# Allegro board 野火_H750X_H743X_核心板_V1.0_底板原理图和PCB参考设计_Allegro格式.brd
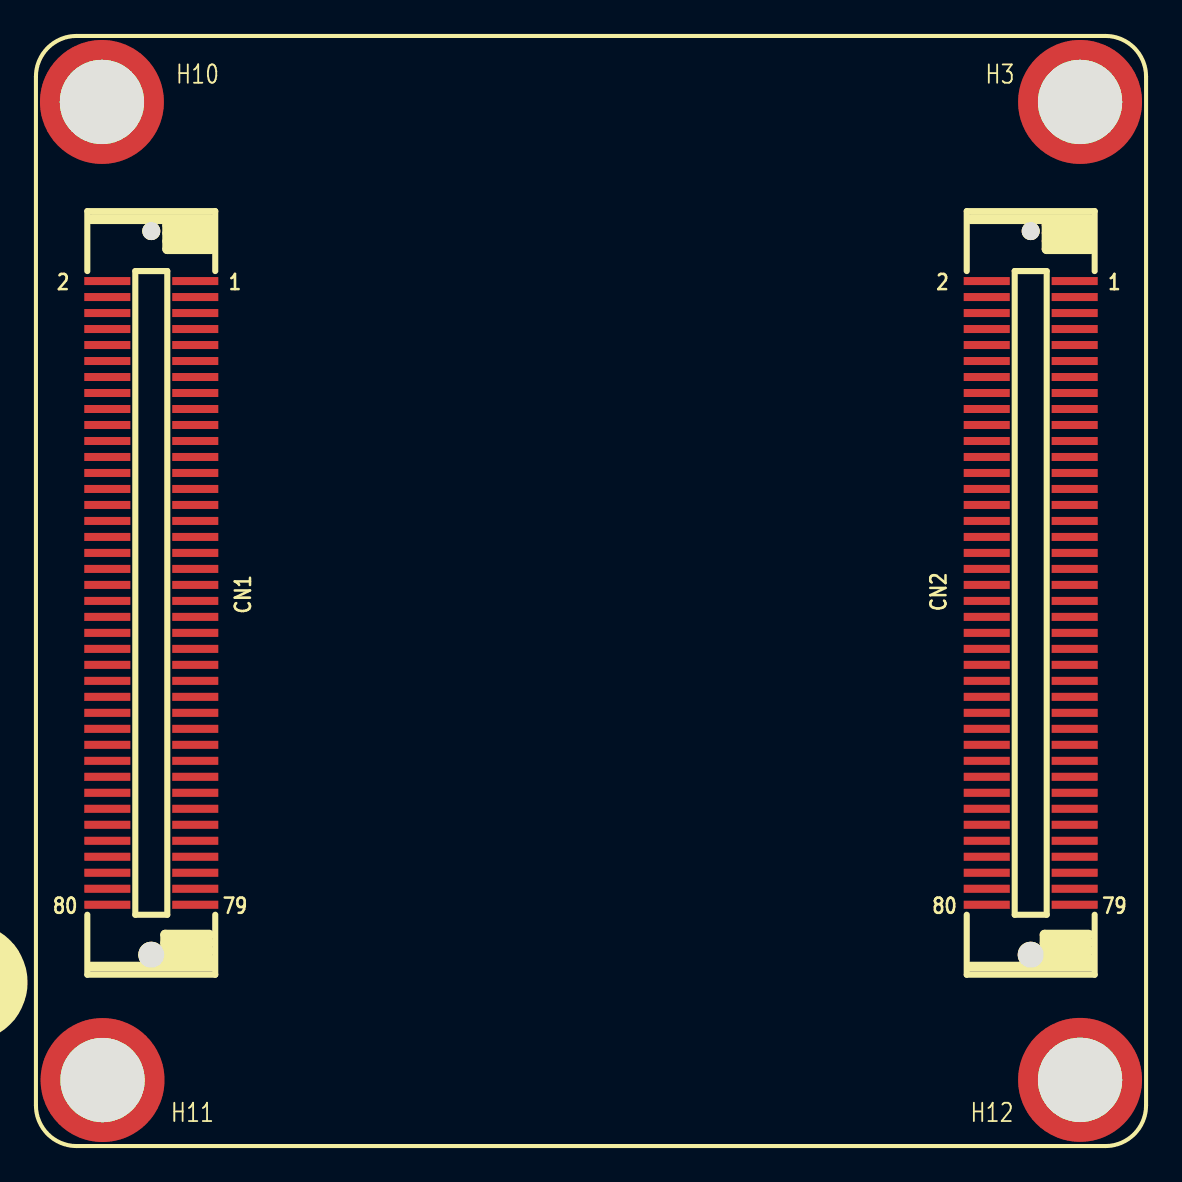
[diagram p0: board, top side]
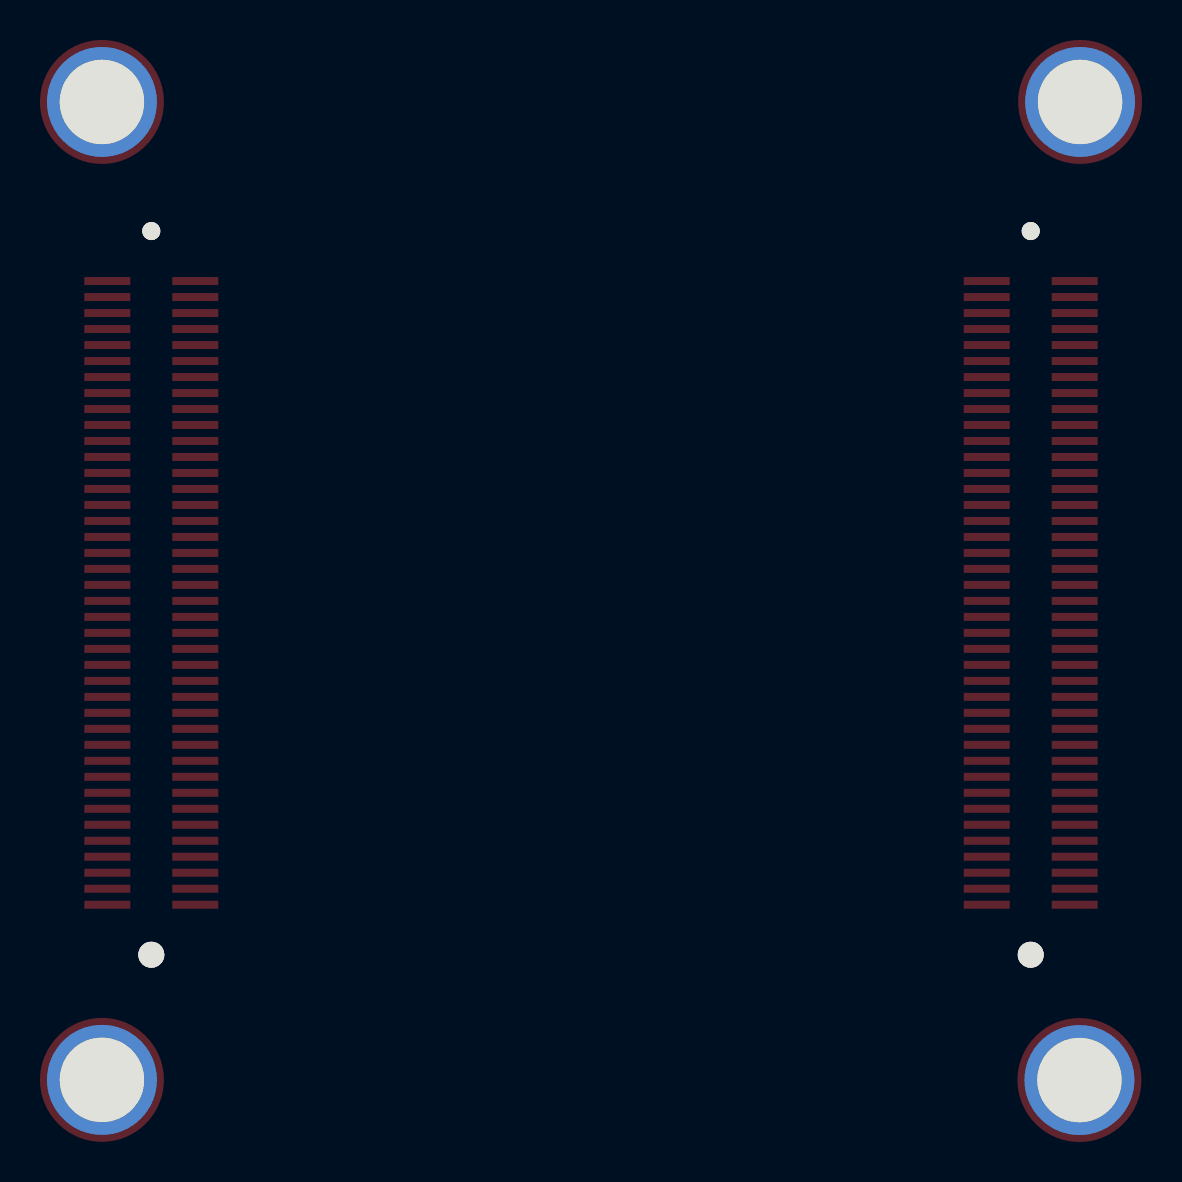
[diagram p1: board, bottom side, seen from below]

No outline. copper layers: TOP, BOTTOM. Coordinates in mm from the lowest, leftmost part position.

## Design rules (mm)
net group DIFFPAIR7: nets PB14 PB15
net group PWR: nets GND VBAT

## Placement (name value [footprint] x y rotation side)
CN1  B2BM_2X40_0P8  [B2BM-2X40-0P8]  9.16 24.37 0 top
CN2  B2BM_2X40_0P8  [B2BM-2X40-0P8]  53.16 24.37 0 top
H3  3.0mm  [T4R2-6R2_TOPSMT]  55.63 48.93 0 top
H10  3.0mm  [T4R2-6R2_TOPSMT]  6.69 48.93 0 top
H11  3.0mm  [T4R2-6R2_TOPSMT]  6.72 0 0 top
H12  3.0mm  [T4R2-6R2_TOPSMT]  55.63 0.01 0 top
NOREF  -  []  0 4.74 0 top

## Library data of the parts
CN1 CN2 = B2BF_2X40_0
H3 H10-H12 = SPACER_0

## Footprints (pads in the part's own frame, mm; a bottom-side part is the same pattern mirrored in y, then rotated)
B2BM-2X40-0P8
  round 0.9 hole 0.9 unplated: (0,18.1)
  round 1.3 hole 1.3 unplated: (0,-18.1)
  rect 2.3x0.4 smd: 1(2.2,15.6) 2(-2.2,15.6) 3(2.2,14.8) 4(-2.2,14.8) 5(2.2,14) 6(-2.2,14) 7(2.2,13.2) 8(-2.2,13.2) 9(2.2,12.4) 10(-2.2,12.4) 11(2.2,11.6) 12(-2.2,11.6) 13(2.2,10.8) 14(-2.2,10.8) 15(2.2,10) 16(-2.2,10) 17(2.2,9.2) 18(-2.2,9.2) 19(2.2,8.4) 20(-2.2,8.4) 21(2.2,7.6) 22(-2.2,7.6) 23(2.2,6.8) 24(-2.2,6.8) 25(2.2,6) 26(-2.2,6) 27(2.2,5.2) 28(-2.2,5.2) 29(2.2,4.4) 30(-2.2,4.4) 31(2.2,3.6) 32(-2.2,3.6) 33(2.2,2.8) 34(-2.2,2.8) 35(2.2,2) 36(-2.2,2) 37(2.2,1.2) 38(-2.2,1.2) 39(2.2,0.4) 40(-2.2,0.4) 41(2.2,-0.4) 42(-2.2,-0.4) 43(2.2,-1.2) 44(-2.2,-1.2) 45(2.2,-2) 46(-2.2,-2) 47(2.2,-2.8) 48(-2.2,-2.8) 49(2.2,-3.6) 50(-2.2,-3.6) 51(2.2,-4.4) 52(-2.2,-4.4) 53(2.2,-5.2) 54(-2.2,-5.2) 55(2.2,-6) 56(-2.2,-6) 57(2.2,-6.8) 58(-2.2,-6.8) 59(2.2,-7.6) 60(-2.2,-7.6) 61(2.2,-8.4) 62(-2.2,-8.4) 63(2.2,-9.2) 64(-2.2,-9.2) 65(2.2,-10) 66(-2.2,-10) 67(2.2,-10.8) 68(-2.2,-10.8) 69(2.2,-11.6) 70(-2.2,-11.6) 71(2.2,-12.4) 72(-2.2,-12.4) 73(2.2,-13.2) 74(-2.2,-13.2) 75(2.2,-14) 76(-2.2,-14) 77(2.2,-14.8) 78(-2.2,-14.8) 79(2.2,-15.6) 80(-2.2,-15.6)
T4R2-6R2_TOPSMT
  round 6.2 hole 4.22: 1(0,0)

## Nets
5V: CN2.75 CN2.76 CN2.77 CN2.78 CN2.79 CN2.80
GND: CN1.9 CN1.39 CN1.45 CN1.46 CN1.57 CN1.58 CN1.59 CN1.65 CN1.66 CN1.69 CN1.70 CN1.79 CN1.80 CN2.1 CN2.2 CN2.11 CN2.12 CN2.21 CN2.22 CN2.37 CN2.38 CN2.39 CN2.41 CN2.43 CN2.44 CN2.47 CN2.48 CN2.51 CN2.52 CN2.53 CN2.54 CN2.59 CN2.60 CN2.61 CN2.62 CN2.69 CN2.70 CN2.71 CN2.72 H3.1(NC_1) H10.1(NC_1) H11.1(NC_1) H12.1(NC_1)
VBAT: CN2.74
BOOT0: CN1.73
NRST: CN2.8
PA0/WKUP: CN1.77
PA0_C: CN2.45
PA1: CN1.6
PA1_C: CN2.46
PA2: CN1.10
PA3: CN1.75
PA4: CN2.23
PA5: CN2.56
PA6: CN2.29
PA7: CN1.7
PA8: CN2.31
PA9: CN1.71
PA10: CN1.72
PA11: CN2.16
PA12: CN2.15
PA13: CN2.5
PA14: CN2.4
PA15: CN2.3
PB0: CN1.74
PB1: CN1.76
PB2: CN1.55
PB3: CN2.6
PB4: CN2.7
PB5: CN2.9
PB6: CN2.10
PB7: CN2.27
PB8: CN2.19
PB9: CN2.20
PB10: CN2.35
PB11: CN1.1
PB12: CN1.68
PB13: CN1.67
PB14: CN2.40
PB15: CN2.42
PC1: CN1.8
PC2: CN2.58
PC2_C: CN2.49
PC3: CN2.13
PC3_C: CN2.50
PC4: CN1.2
PC5: CN1.4
PC6: CN2.36
PC7: CN2.34
PC8: CN2.63
PC9: CN2.65
PC10: CN2.67
PC11: CN2.64
PC12: CN2.68
PC13/TAMPER: CN1.78
PD2: CN2.66
PD3: CN2.26
PD4: CN1.61
PD5: CN1.63
PD6: CN1.64
PD7: CN2.14
PD11: CN1.60
PD12: CN1.62
PD13: CN1.40
PE2: CN2.17
PE3: CN2.18
PE4: CN2.28
PE5: CN2.24
PE6: CN2.25
PF6: CN1.47
PF7: CN1.49
PF8: CN1.51
PF9: CN1.53
PF10: CN2.33
PG3: CN1.42
PG6: CN1.56
PG7: CN1.41
PG9: CN1.50
PG10: CN2.32
PG11: CN2.30
PG12: CN1.5
PG13: CN1.3
PG14: CN1.48
PH2: CN1.54
PH3: CN1.52
PH4: CN1.43
PH5: CN1.44
PI8: CN2.55
PI11: CN2.57
PI12: CN1.36
PI13: CN1.35
PI14: CN1.37
PI15: CN1.11
PJ0: CN1.12
PJ1: CN1.13
PJ2: CN1.14
PJ3: CN1.15
PJ4: CN1.16
PJ5: CN1.17
PJ6: CN1.18
PJ7: CN1.19
PJ8: CN1.20
PJ9: CN1.21
PJ10: CN1.22
PJ11: CN1.23
PJ12: CN1.27
PJ13: CN1.28
PJ14: CN1.29
PJ15: CN1.30
PK0: CN1.24
PK1: CN1.25
PK2: CN1.26
PK3: CN1.31
PK4: CN1.32
PK5: CN1.33
PK6: CN1.34
PK7: CN1.38
VREF+: CN2.73

## Copper pours and planes (outline as drawn; the poured copper is in the pictures)
5V on BOTTOM: 80.26,-27.14 79.5,-26.38 79.5,-20.66 80.52,-19.65 81.53,-19.65 98.42,-2.76 101.85,-2.76 104.01,-0.6 104.01,10.83 103.12,11.72 103.12,25.44 103.63,25.95 108.84,25.95 112.65,29.76 126.62,29.76 126.87,29.5 126.87,28.11 126.62,27.85 113.41,27.85 109.09,23.53 106.17,23.53 105.03,22.39 105.03,12.36 106.3,11.09 106.3,-4.79 92.58,-18.5 88.26,-18.5 87.25,-19.52 87.25,-25.23 85.34,-27.14 ; 1 cut-out

## Text on the board
NCLEGEND-1-2: FIGURE | SIZE | 8.0 | 10.0 | 16.0 | 29.53 | 31.5 | 32.0 | 35.0 | 35.43 | 37.0 | 39.37 | 40.0 | 40.16 | 47.24 | 62.0 | 78.74 | 166.14 | 46.0 | 51.18 | 140.0 | 47.24x19.69 | 80.0x40.0 | 150.0x19.69 | 150.0x60.0 | DRILL CHART: TOP to BOTTOM | ALL UNITS ARE IN MILS | PLATED | NON-PLATED | QTY | 18 | 995 | 740 | 13 | 4 | 2 | 8 | 30 | 3 | 234 | 7 | 24 | 9 | 10 | 16 | 38 | 1
